# Altium PCB 01DriverOccure&SignalDetect.PcbDoc (part 1 of 3)
Units mil, origin at the board's own origin, x right, y up, seen from the top; angles counter-clockwise.
Board outline 5526.23 x 3781.16 mil, 2 copper layers (Top Layer, Bottom Layer); 144 components, 81 nets, 385 pads, 179 vias.
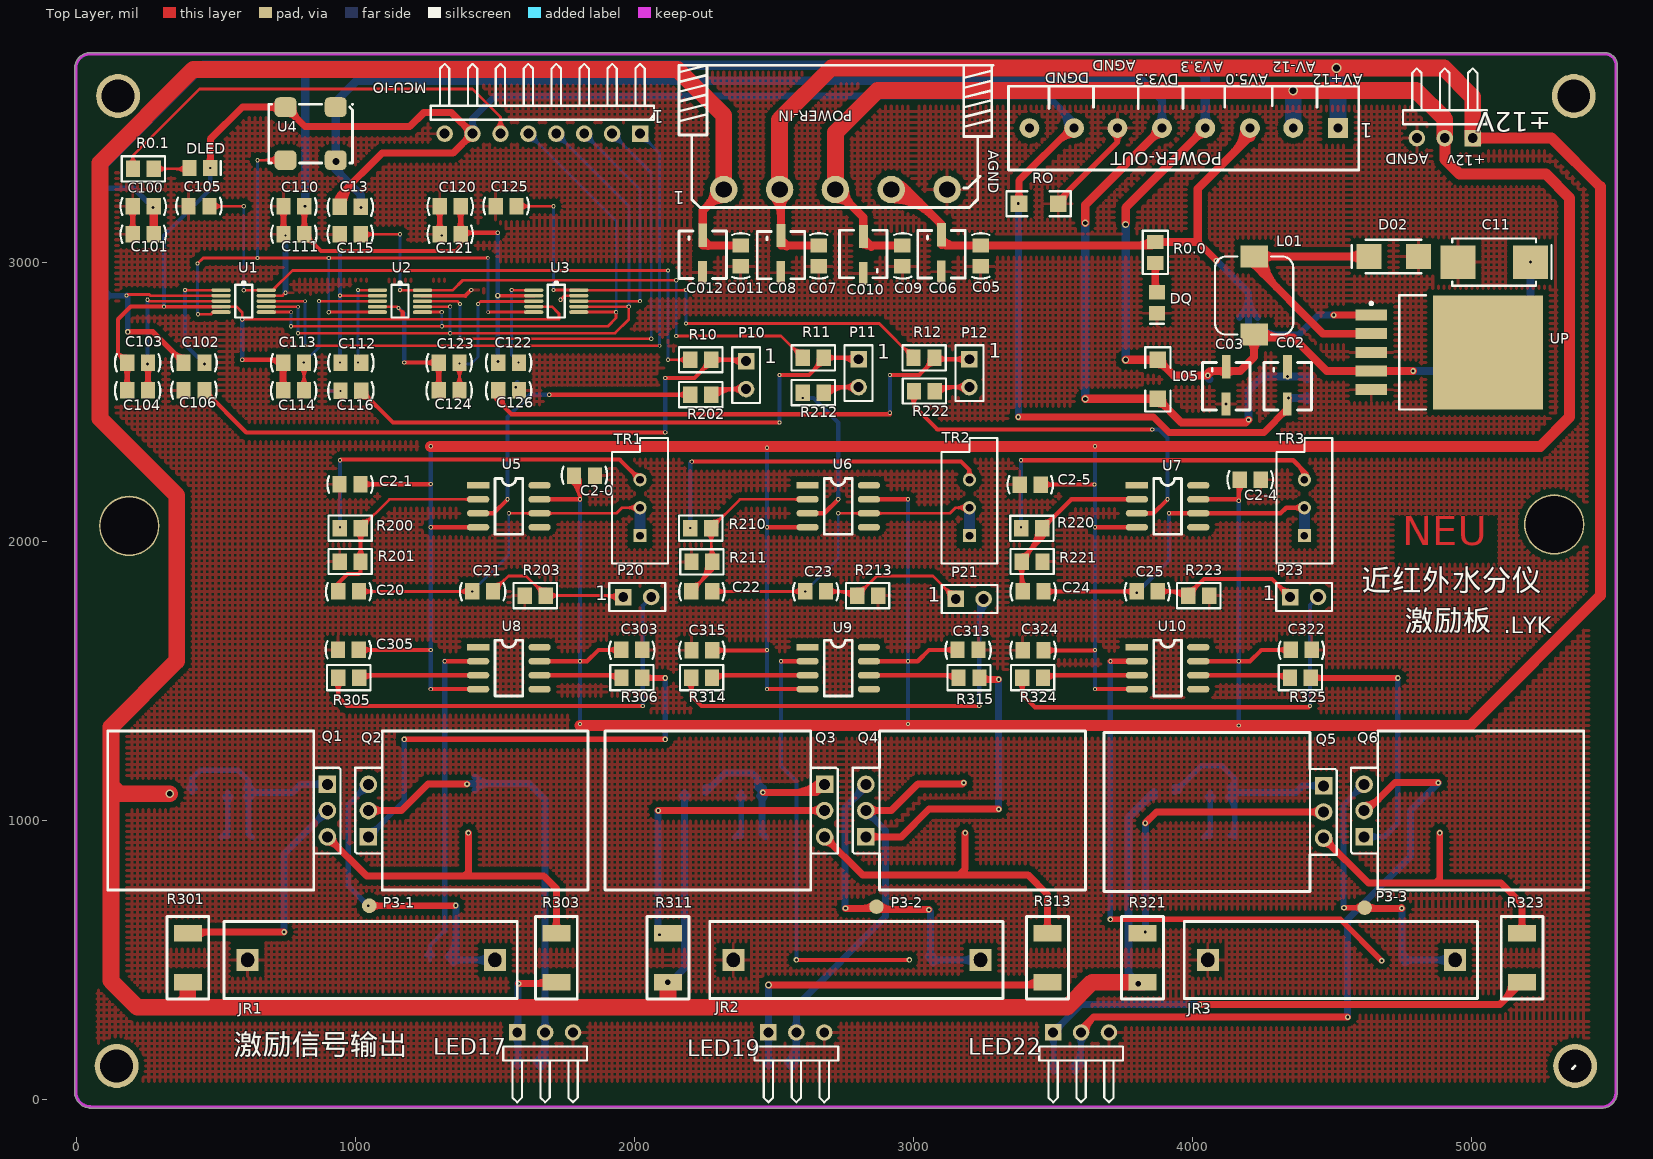
[diagram p0: Top Layer view]
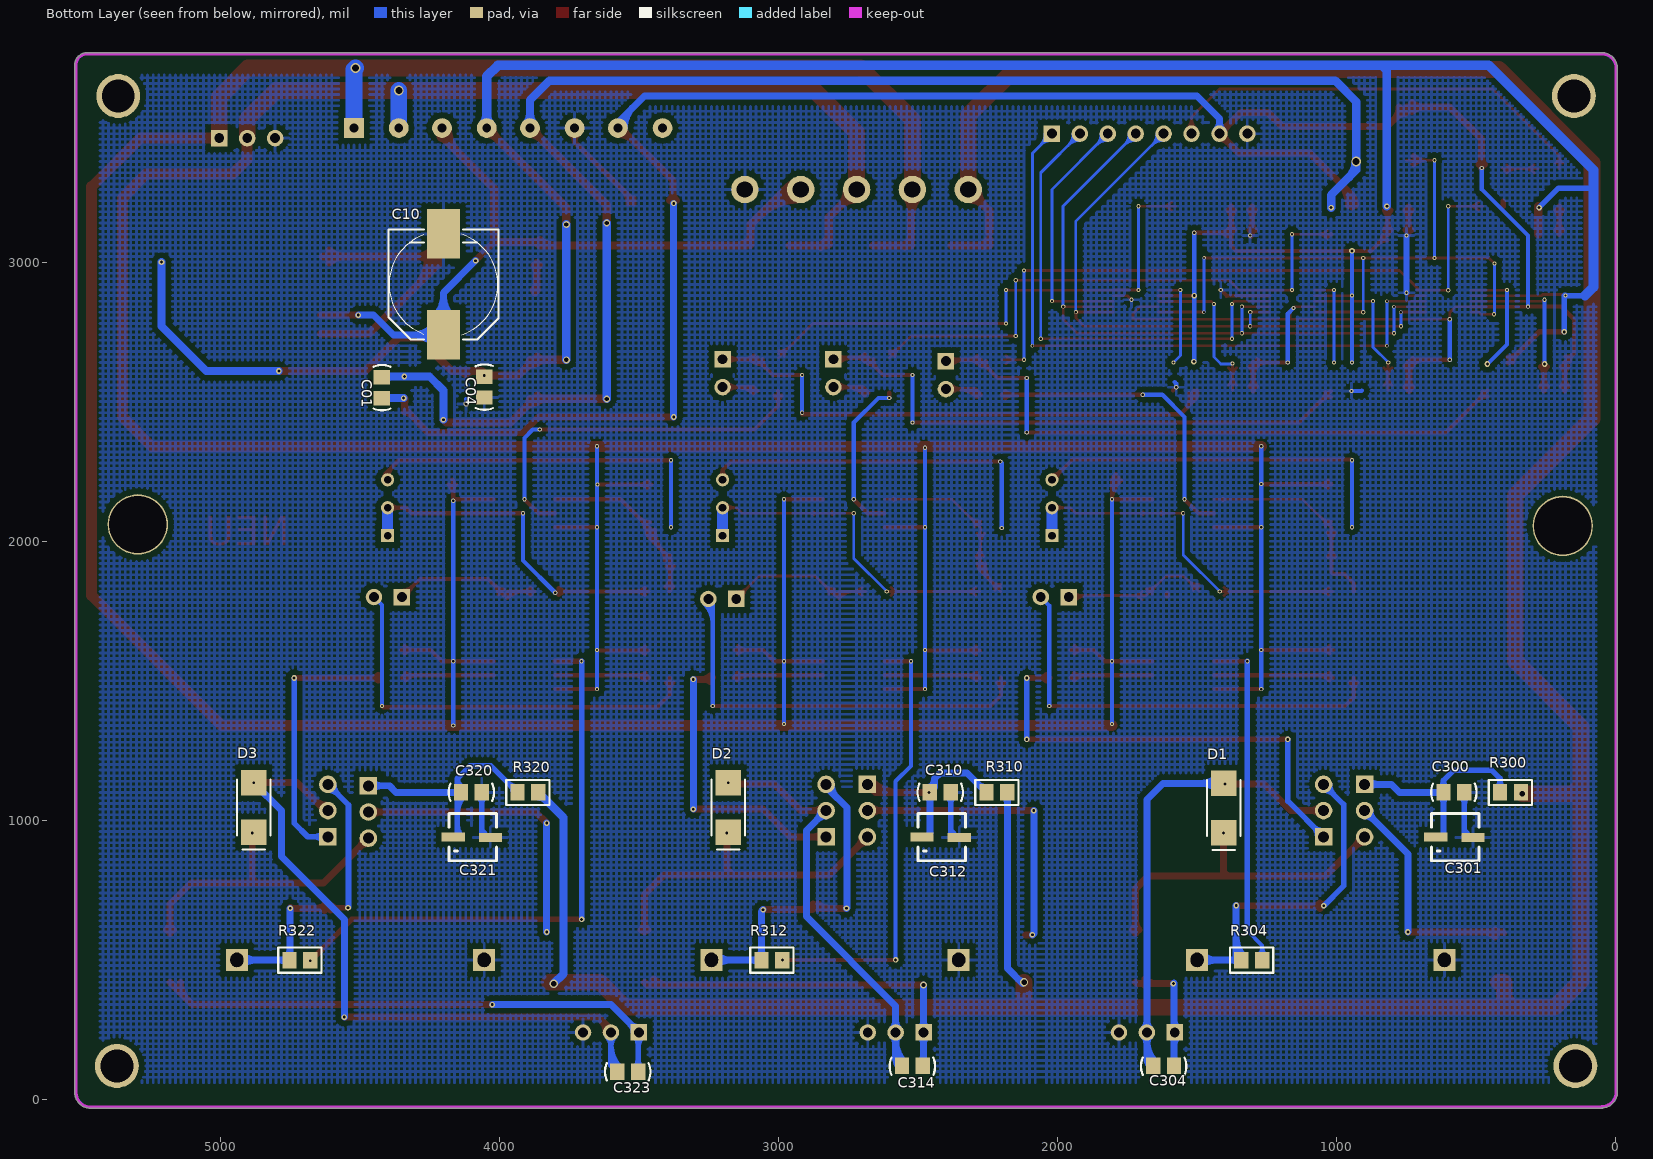
[diagram p1: Bottom Layer view, seen from below]

## Layer stack, top to bottom
Top Layer: signal copper 1.4
Dielectric: dielectric 12.6, FR-4, Dk 4.8
Bottom Layer: signal copper 1.4

## Board outline
-5.01,20.25 -5.01,3693.44 cw(c-0.25,3695) -5.26,3695 cw(c50,3695) 44.5,3749.99 cw(c45,3745) 45,3750.02 5476.71,3750.02 cw(c5476.71,3705.57) 5520.94,3709.99 cw(c5515.95,3709.49) 5520.96,3709.49 5520.27,23.87 cw(c5465,23.87) 5470.5,-31.12 cw(c5470,-26.13) 5470,-31.14 50,-31.14 cw(c50,-26.13) 46.72,-29.92 cw(c50,25.25) -4.99,19.75 cw(c0,20.25)

## Design rules (kind name [scope] priority, off if disabled: settings)
Clearance Clearance_17 [InNamedPolygon('Top Layer-r')] p1: gap=20
Clearance Clearance_16 [InNamedPolygon('Top Layer-b')] p2: gap=20
Clearance Clearance_15 [InNamedPolygon('Top Layer-No Net')] p3: gap=20
Clearance Clearance_14 [InNamedPolygon('Top Layer-No Net')] p4: gap=20
Clearance Clearance_13 [InNamedPolygon('Top Layer-No Net')] p5: gap=15
Clearance Clearance_12 [InNamedPolygon('Top Layer-No Net')] p6: gap=20
Clearance Clearance_11 [InNamedPolygon('Top Layer-No Net')] p7: gap=20
Clearance Clearance_10 [InNamedPolygon('Top Layer-No Net')] p8: gap=10
Clearance Clearance_9 [InNamedPolygon('Top Layer-No Net')] p9: gap=20
Clearance Clearance_8 [InNamedPolygon('Top Layer-No Net')] p10: gap=20
Clearance Clearance_7 [InNamedPolygon('Top Layer-No Net')] p11: gap=20
Clearance Clearance_6 [InNamedPolygon('Top Layer-No Net')] p12: gap=20
Clearance Clearance_5 [InNamedPolygon('Top Layer-No Net')] p13: gap=20
Clearance Clearance_4 [InNamedPolygon('Top Layer-No Net')] p14: gap=30
Clearance Clearance_3 [InNamedPolygon('Top Layer-No Net')] p15: gap=20
Clearance Clearance_2 [InNamedPolygon('Top Layer-No Net')] p16: gap=20
Clearance Clearance_1 [InNamedPolygon('Top Layer-No Net')] p17: gap=20
Clearance [All] p18: gap=6
HoleSize [All] p1: absolutevalues=TRUE maxlimit=296.85 minlimit=1 maxpercent=80.000 minpercent=20.000
HoleToHoleClearance [All] p1: gap=6.06 allowstackedmicrovias=TRUE
PolygonConnect [All] p1: connectstyle=Relief reliefconductorwidth=10 reliefentries=4 polygonreliefangle="90 Angle"
RoutingCorners [All] p1: cornerstyle=45-Degree minsetback=50 maxsetback=493.7
RoutingVias [All] p1: holewidth=28 width=50 viastyle="Through Hole" minholewidth=8 minwidth=10 maxholewidth=246.85 maxwidth=316.22
SilkToSilkClearance [All] p1: silktosilkclearance=8
SilkscreenOverComponentPads [All] p1: minsilkscreentomaskgap=2.13
SolderMaskExpansion [All] p1: expansion=4
TestPointUsage [All] p1: valid=0 allowmultiple=FALSE
Testpoint [All] p1: side=15 testpointundercomponent=TRUE minsize=40 maxsize=100 preferedsize=60 minholesize=0 maxholesize=40 preferedholesize=32 testpointgrid=1 style=1021 order=0-112345678
Width [All] p1: maxlimit=393.7 minlimit=5 preferedwidth=10
19 further rules are at their usual default settings.

## Components (designator, comment, footprint, x,y, rotation, side; value= is the part's Value field where it differs from the comment)
C01 "Cap" CC0805 4421,2550 r270 bottom
C02 "Cap Pol1" "4*4.5 贴片电解电容" 4340,2500 r180 top
C2-0 "Cap" CC0805 1821,2235 r0 top
C2-1 "Cap" CC0805 981,2204 r180 top
C2-4 "Cap" CC0805 4206,2220 r0 top
C2-5 "Cap" CC0805 3418,2203 r180 top
C03 "Cap Pol1" "4*4.5 贴片电解电容" 4120,2500 r180 top
C04 "Cap" CC0805 4054,2552 r270 bottom
C05 "Cap" CC0805 3240,3022 r270 top
C06 "Cap Pol1" "4*4.5 贴片电解电容" 3100,2973 r180 top
C07 "Cap" CC0805 2660,3022 r270 top
C08 "Cap Pol1" "4*4.5 贴片电解电容" 2525,2970 r180 top
C09 "Cap" CC0805 2960,3022 r270 top
C010 "Cap Pol1" "4*4.5 贴片电解电容" 2820,3084 r0 top
C10 "Cap Pol1" C-RB-S10 4200,2920 r90 bottom
C11 "Cap Pol1" CAP-7343 5080,3000 r180 top
C011 "Cap" CC0805 2380,3022 r270 top
C012 "Cap Pol1" "4*4.5 贴片电解电容" 2245,2971 r180 top
C13 "Cap" CC0805 982,3198 r180 top
C20 "Cap" CC0805 976,1820 r180 top
C21 "Cap" CC0805 1456,1820 r180 top
C22 "Cap" CC0805 2241.22,1820 r180 top
C23 "Cap" CC0805 2649,1820 r180 top
C24 "Cap" CC0805 3428.22,1820 r180 top
C25 "Cap" CC0805 3837,1820 r180 top
C100 "Cap2" CC0805 240,3200 r180 top
C101 "Cap" CC0805 240,3100 r180 top
C102 "Cap" CC0805 422,2640 r180 top
C103 "Cap2" CC0805 220,2640 r180 top
C104 "Cap" CC0805 220,2540 r180 top
C105 "Cap" CC0805 440,3200 r0 top
C106 "Cap" CC0805 422,2540 r0 top
C110 "Cap2" CC0805 780,3200 r180 top
C111 "Cap" CC0805 780,3100 r180 top
C112 "Cap" CC0805 984,2640 r180 top
C113 "Cap2" CC0805 779,2640 r180 top
C114 "Cap" CC0805 779,2540 r180 top
C115 "Cap" CC0805 982,3099 r0 top
C116 "Cap" CC0805 984,2538.28 r0 top
C120 "Cap2" CC0805 1340,3200 r180 top
C121 "Cap" CC0805 1340,3100 r180 top
C122 "Cap" CC0805 1549,2640 r180 top
C123 "Cap2" CC0805 1336,2640 r180 top
C124 "Cap" CC0805 1336,2540 r180 top
C125 "Cap" CC0805 1540,3200 r0 top
C126 "Cap" CC0805 1549,2540 r180 top
C300 "Cap" CC0805 580,1100 r180 bottom
C301 "Cap Pol1" "4*4.5 贴片电解电容" 520,940 r270 bottom
C303 "Cap" CC0805 1990,1610.72 r180 top
C304 "Cap" CC0805 1620,120 r0 bottom
C305 "Cap" CC0805 975,1610.72 r0 top
C310 "Cap" CC0805 2420,1100 r180 bottom
C312 "Cap Pol1" "4*4.5 贴片电解电容" 2360,940 r270 bottom
C313 "Cap" CC0805 3195,1610.72 r180 top
C314 "Cap" CC0805 2520,120 r0 bottom
C315 "Cap" CC0805 2241.38,1609 r0 top
C320 "Cap" CC0805 4100,1100 r180 bottom
C321 "Cap Pol1" "4*4.5 贴片电解电容" 4040,940 r270 bottom
C322 "Cap" CC0805 4389,1610.72 r180 top
C323 "Cap" CC0805 3540,100 r0 bottom
C324 "Cap" CC0805 3428,1609 r0 top
D1 "1N5817" DIODE-SMA 1405,1044 r270 bottom
D02 "1N5824" DIODE-SMA 4720,3020 r180 top
D2 "1N5817" DIODE-SMA 3180,1046 r270 bottom
D3 "1N5817" DIODE-SMA 4880,1046 r270 bottom
DLED "Alarm" LED_0805 443,3337 r0 top
DQ "Alarm" LED_0805 3872,2854 r270 top
JR1 "Res2" FUSE 1500,500 r180 top
JR2 "Res2" FUSE 3240,500 r180 top
JR3 "Res2" FUSE 4940,500 r180 top
L01 "Inductor" L-SMD-7 4220,2880 r90 top
L05 "Inductor" 1206 3875,2580 r270 top
LED17 "接入LED17" HDR1X3H 1580,240 r0 top
LED19 "接入LED19" HDR1X3H 2480,240 r0 top
LED22 "接入LED22" HDR1X3H 3500,240 r0 top
MCU-IO "MCU信号输入" HDR1X8H 2020,3460 r180 top
P3-1 "测试点" Text_PAD 1049,696 r90 top
P3-2 "测试点" Text_PAD 2866,693 r90 top
P3-3 "测试点" Text_PAD 4615,689 r90 top
P10 "跳针" HDR1X2 2400,2645 r270 top
P11 "跳针" HDR1X2 2803,2652 r270 top
P12 "跳针" HDR1X2 3200,2652 r270 top
P20 "AMP跳针" HDR1X2 1960,1800 r0 top
P21 "AMP跳针" HDR1X2 3151,1793 r0 top
P23 "AMP跳针" HDR1X2 4349,1800 r0 top
POWER-IN "电源输入" 5角弯式电源插座 2720,3260 r0 top
POWER-OUT "电源输出" 小立式电源接口 4520,3480 r180 top
Q1 "IRF530" TIP122-带卧式散热 900,1035 r90 top
Q2 "TIP122" TIP122-带卧式散热 1047,1035 r270 top
Q3 "IRF530" TIP122-带卧式散热 2681,1035 r90 top
Q4 "TIP122" TIP122-带卧式散热 2829,1035 r270 top
Q5 "IRF530" TIP122-带卧式散热 4469,1030 r90 top
Q6 "TIP122" TIP122-带卧式散热 4614,1035 r270 top
R0.0 "1K" 0805 3866,2997 r90 top
R0.1 "500" 0805 278,3334 r180 top
R10 "Res2" 0805 2200,2650 r0 top
R11 "Res2" 0805 2603,2657 r0 top
R12 "Res2" 0805 3000,2657 r0 top
R200 "Res2" 0805 1019,2047 r180 top
R201 "Res2" 0805 944,1927 r0 top
R202 "Res2" 0805 2275,2525 r180 top
R203 "Res2" 0805 1607,1805 r0 top
R210 "Res2" 0805 2275,2047 r180 top
R211 "Res2" 0805 2204,1926 r0 top
R212 "Res2" 0805 2678,2532 r180 top
R213 "Res2" 0805 2873,1805 r180 top
R220 "Res2" 0805 3461,2046 r180 top
R221 "Res2" 0805 3462,1927 r180 top
R222 "Res2" 0805 3076,2538 r180 top
R223 "Res2" 0805 4059,1805 r180 top
R300 "Res2" 0805 340,1100 r0 bottom
R301 "Res2" 2010贴片 400,420 r90 top
R303 "Res2" 2010贴片 1720,420 r90 top
R304 "Res2" 0805 1267,499 r0 bottom
R305 "Res2" 0805 939,1511 r0 top
R306 "Res2" 0805 2028,1511 r180 top
R310 "Res2" 0805 2180,1100 r0 bottom
R311 "Res2" 2010贴片 2120,420 r90 top
R312 "Res2" 0805 2986,499 r0 bottom
R313 "Res2" 2010贴片 3480,420 r90 top
R314 "Res2" 0805 2203,1511 r0 top
R315 "Res2" 0805 3236,1511 r180 top
R320 "Res2" 0805 3860,1100 r0 bottom
R321 "Res2" 2010贴片 3820,420 r90 top
R322 "Res2" 0805 4677,499 r0 bottom
R323 "Res2" 2010贴片 5180,420 r90 top
R324 "Res2" 0805 3389,1511 r0 top
R325 "Res2" 0805 4423,1511 r180 top
RO "Res2" 1206 3448,3209 r180 top
TR1 "RPot" VR5 2020,2120 r90 top
TR2 "RPot" VR5 3200,2120 r90 top
TR3 "RPot" VR5 4400,2120 r90 top
U1 "AD9833" MSOP_AD9833_10N 600,2860 r0 top
U2 "AD9833" MSOP_AD9833_10N 1160,2860 r0 top
U3 "AD9833" MSOP_AD9833_10N 1720,2860 r0 top
U4 "MCLK" X-CPX75 840,3460 r0 top
U5 "OP37EZ" SO-8-N 1440,2200 r0 top
U6 "OP37EZ" SO-8-N 2620,2200 r0 top
U7 "OP37EZ" SO-8-N 3800,2200 r0 top
U8 "OPA07" SO-8-N 1440,1620 r0 top
U9 "OPA07" SO-8-N 2620,1620 r0 top
U10 "OPA07" SO-8-N 3800,1620 r0 top
UP "LM2596S-3.3" LM2596S 4740,2680 r0 top
±12V "信号处理板连接" HDR1X3H 5003,3444 r180 top

## Footprints (in the part's own frame and the unit in brackets; to place one, negate y for a bottom-side part, rotate by r counter-clockwise, add the part's x,y. Pads: shape width x height; smd on the part's side, far side on the other; paste and mask are expansions set on the pad)
"4*4.5 贴片电解电容" [mm] "10uf-16V / 25V铝电解电容"
  rect 0.8x2.1 smd: 1(0,-3.175) 2(0.025,0.203)
  silkscreen extent -2.16,-3.56 2.16,0.76
5角弯式电源插座 [mm]
  round 2.5 hole 1.5: 1(-10.16,0) 2(-5.08,0) 3(0,0) 4(5.08,0) 5(10.16,0)
  silkscreen extent -14.22,-1.65 14.35,11.3
0805 [mm]
  rect 1.3x1.5 smd: 1(0,0) 2(1.9,0)
  silkscreen extent -1.02,-1.14 2.92,1.14
1206 [mil] "贴片元件"
  rect 60x60 smd: 1(-70,0) 2(70,0)
  silkscreen extent -115,-45 115,45, body extent -75,-35 75,35, height 39
2010贴片 [mm]
  rect 1.52x2.54 smd: 1(0,0) 2(4.445,0)
  silkscreen extent -1.52,-1.91 5.97,1.91
C-RB-S10 [mm] "贴片电解"
  rect 4.5x3 smd: 1(-4.6,0) 2(4.6,0)
  silkscreen extent -5,-5 5,5
CAP-7343 [mm] "钽电容"
  rect 3.2x3.05 smd: 1(-3.302,0) 2(3.302,0)
  silkscreen extent -5.21,-2.16 3.81,2.16, body extent -3.68,-1.91 3.68,1.91, height 2.95
CC0805 [mm] "贴片电容"
  rect 1.3x1.5 smd: 1(-0.95,0) 2(0.95,0)
  silkscreen extent -2.06,-0.76 2.06,0.81, body extent -1.27,-0.64 1.27,0.64, height 0.9
DIODE-SMA [mm] "贴片二极管"
  rect 2.3x2.3 smd: 1(-2.25,0) 2(2.25,0)
  silkscreen extent -2.54,-1.52 3.81,1.52, body extent -2.92,-1.4 2.92,1.4, height 3
FUSE [mm]
  rect 2x2 hole 1.2 slot 1.3 at 90 deg: 1(0,0) 2(22.5,0)
  silkscreen extent -2.03,-3.5 24.64,3.53
HDR1X2 [mm] "Connector; Header; 2 Position"
  rect 1.5x1.5 hole 0.9: 1(0,0)
  round 1.5 hole 0.9: 2(2.54,0)
  silkscreen extent -1.27,-1.27 3.81,1.27
HDR1X3H [mm] "Connector; Header; 3 Position; Right Angle"
  rect 1.5x1.5 hole 0.9: 1(0,0)
  round 1.5 hole 0.9: 2(2.54,0) 3(5.08,0)
  silkscreen extent -1.27,-6.35 6.35,-1.27
HDR1X8H [mm] "Connector; Header; 8 Position; Right Angle"
  rect 1.5x1.5 hole 0.9: 1(0,0)
  round 1.5 hole 0.9: 2(2.54,0) 3(5.08,0) 4(7.62,0) 5(10.16,0) 6(12.7,0) 7(15.24,0) 8(17.78,0)
  silkscreen extent -1.27,-6.35 19.05,-1.27
L-SMD-7 [mm] "贴片电感7*7"
  rect 2x2.5 smd: 1(-3.556,0) 2(3.556,0)
  silkscreen extent -3.56,-3.56 3.56,3.56, body extent -3.56,-3.56 3.56,3.56, height 4
LED_0805 [mm] "贴片二极管"
  rect 1.3x1.5 smd: 1(-0.95,0) 2(0.95,0)
  silkscreen extent 1.91,-0.64 1.91,0.64
LM2596S [mm]
  rect 2.9x1 smd: 1(-2.545,3.313) 2(-2.545,1.613) 3(-2.545,-0.087) 4(-2.545,-1.787) 5(-2.545,-3.487)
  rect 10x10.4 smd: 6(8.077,-0.102)
  silkscreen extent -2.67,-5.29 2.4,5.11, body extent 0,-5.29 9.4,5.11, height 4.65
MSOP_AD9833_10N [mm] "TSSOP, 10-Leads, Body 3.0x3.0mm (max), Pitch 0.50mm, IPC Medium Density"
  oval 1.75x0.345 smd mask+0.092: 1(-2.05,1) 2(-2.05,0.5)
  oval 1.75x0.345 smd: 3(-2.05,0) 4(-2.05,-0.5) 5(-2.05,-1) 6(2.05,-1) 7(2.05,-0.5) 8(2.05,0) 9(2.05,0.5) 10(2.05,1)
  silkscreen extent -0.78,-1.5 0.78,1.78
SO-8-N [mil]
  rect 80x24 smd: 1(0,0)
  oval 80x24 smd: 2(0,-50) 3(0,-100) 4(0,-150) 5(220,-150) 6(220,-100) 7(220,-50) 8(220,0)
  silkscreen extent 60,-175 160,25
Text_PAD [mil]
  round 52.13 smd: 0(-2,-1)
TIP122-带卧式散热 [mm]
  rect 1.6x1.6 hole 1: 1(2.385,0)
  round 1.6 hole 1: 2(0,0) 3(-2.39,0)
  silkscreen extent -7.24,-1.19 7.24,19.99
VR5 [mm] "Potentiometer; 3 Leads"
  rect 1.2x1.2 hole 0.7: 1(-2.54,0)
  round 1.2 hole 0.7: 2(0,0) 3(2.54,0)
  silkscreen extent -5.08,-2.54 6.35,2.54
X-CPX75 [mm]
  rrect50% 2x1.8 smd: 1(2.281,2.415) 2(-2.291,2.415) 3(-2.291,-2.411) 4(2.281,-2.411)
  silkscreen extent -3.81,-2.66 3.81,2.67
小立式电源接口 [mm]
  rect 1.8x1.8 hole 0.8: 1(0,0)
  round 1.8 hole 0.8: 2(4.064,0) 3(8.001,0) 4(12.065,0) 5(16.002,0) 6(20.066,0) 7(24.003,0) 8(28.067,0)
  silkscreen extent -1.91,-3.81 29.97,3.81

## Part data
C01 C2-0 C2-1 C2-4 C2-5 C04 C05 C07 C09 C011 C13 C20 C21 C22 C23 C24 C25 C100 C101 C102 C103 C104 C105 C106 C110 C111 C112 C113 C114 C115 C116 C120 C121 C122 C123 C124 C125 C126 C300 C303 C304 C305 C310 C313 C314 C315 C320 C322 C323 C324: "Capacitor"
C02 C03 C06 C08 C010 C10 C11 C012 C301 C312 C321: "Polarized Capacitor (Radial)"
D1 D2 D3: library part DIODE, "Diode"
D02: library part "D Schottky", "Schottky Diode"
DLED DQ: library part LED0, "Typical INFRARED GaAs LED"
JR1 JR2 JR3 R10 R11 R12 R200 R201 R202 R203 R210 R211 R212 R213 R220 R221 R222 R223 R300 R301 R303 R304 R305 R306 R310 R311 R312 R313 R314 R315 R320 R321 R322 R323 R324 R325 RO: "Resistor"
LED17 LED19 LED22 ±12V: library part "Header 3H", "Header, 3-Pin, Right Angle"
MCU-IO: library part "Header 8H", "Header, 8-Pin, Right Angle"
P10 P11 P12 P20 P21 P23: library part "Header 2", "Header, 2-Pin"
POWER-IN: library part "Header 5H", "Header, 5-Pin, Right Angle"
POWER-OUT: library part "Header 8", "Header, 8-Pin"
Q1 Q3 Q5: library part NMOS-2, "N-Channel Power MOSFET"
Q2 Q4 Q6: library part NPN2, "NPN Darlington Bipolar Transistor"
R0.0 R0.1: library part RES2
TR1 TR2 TR3: "Potentiometer"
U1 U2 U3: "波形发生器"
U4: "有源晶振1MHZ ,5V"
U5 U6 U7: "Low-Noise, Precision, High-Speed Operational Amplifier (Avcl >= 5)"
U8 U9 U10: library part OP37GS, "Low-Noise, Precision, High-Speed Operational Amplifier (Avcl >= 5)"
UP: library part LM2596S-5.0, "Simple Switcher Power Converter 150 kHz 3A Step Down Voltage Regulator"

## Free pads (board coordinates)
  round 157.48 hole 118.11: 0(145,120) 1(150,3595) 2(5370,120) 3(5365,3595)
  round 216.54 hole 204.72: 4(190,2055) 5(5295,2060)

## Via types
v1: diameter 15, hole 8, Top Layer to Bottom Layer, 110 vias
v2: diameter 20, hole 10, Top Layer to Bottom Layer, 51 vias
v3: diameter 12, hole 8, Top Layer to Bottom Layer, 7 vias
v4: diameter 25, hole 15, Top Layer to Bottom Layer, 5 vias
v5: diameter 30, hole 20, Top Layer to Bottom Layer, 3 vias
v6: diameter 35, hole 25, Top Layer to Bottom Layer, 3 vias

## Nets (pads, with @x,y where several pads share a name; then routed paths per layer and width w, separated by ;. In a path a pad name is that pad's centre, name@x,y a point inside that pad or via, vN(x,y) a via of type N, cw(c..) or ccw(c..) an arc to the next point about the centre after c; other vN are vias at no path point)
AD9833_OUT1: C106.2 P10.1 R10.2 | length 3097.8
  Top Layer w15: C106.2@459.4,2540 609.4,2390 v1(2110,2390) ; v1(2110,2585) 2215,2585 2274.8,2644.8 R10.2@2274.8,2650 2395,2650 P10.1@2400,2645 ; C106.2@459.4,2517.97 cw(c459.4,2464.79) 497.01,2502.4 ; C106.2@459.4,2517.97 cw(c459.4,2464.79) 497.01,2502.4 ; C106.2@459.4,2517.97 cw(c459.4,2464.79) 497.01,2502.4 ; C106.2@477.49,2536.06 ccw(c511.66,2536.06) 487.5,2511.9 ; C106.2@477.49,2536.06 ccw(c511.66,2536.06) 487.5,2511.9 ; C106.2@477.49,2536.06 ccw(c511.66,2536.06) 487.5,2511.9 ; 2243.03,2613.03 ccw(c2210,2646.06) R10.2@2256.71,2646.06 ; 2243.03,2613.03 ccw(c2210,2646.06) R10.2@2256.71,2646.06 ; 2243.03,2613.03 ccw(c2210,2646.06) R10.2@2256.71,2646.06 ; 2246.07,2616.07 cw(c2274.8,2587.34) R10.2@2274.8,2627.97 ; 2246.07,2616.07 cw(c2274.8,2587.34) R10.2@2274.8,2627.97 ; 2246.07,2616.07 cw(c2274.8,2587.34) R10.2@2274.8,2627.97 ; R10.2@2287.6,2637.21 cw(c2318.48,2606.33) 2318.48,2650 ; R10.2@2287.6,2637.21 cw(c2318.48,2606.33) 2318.48,2650 ; R10.2@2287.6,2637.21 cw(c2318.48,2606.33) 2318.48,2650 ; R10.2@2287.6,2662.79 ccw(c2318.48,2693.67) 2318.48,2650 ; R10.2@2287.6,2662.79 ccw(c2318.48,2693.67) 2318.48,2650 ; R10.2@2287.6,2662.79 ccw(c2318.48,2693.67) 2318.48,2650 ; 2334.75,2650 cw(c2334.75,2579.75) P10.1@2384.42,2629.42 ; 2334.75,2650 cw(c2334.75,2579.75) P10.1@2384.42,2629.42 ; 2334.75,2650 cw(c2334.75,2579.75) P10.1@2384.42,2629.42 ; 2358.89,2650 ccw(c2358.89,2686.11) P10.1@2384.42,2660.58 ; 2358.89,2650 ccw(c2358.89,2686.11) P10.1@2384.42,2660.58 ; 2358.89,2650 ccw(c2358.89,2686.11) P10.1@2384.42,2660.58
  Bottom Layer w15: v1(2110,2390) v1(2110,2585)
AD9833_OUT2: C116.2 P11.1 R11.2 | length 2899.7
  Top Layer w15: C116.2@1021.4,2538.28 1134.68,2425 v1(2520,2425) ; v1(2520,2595) 2625,2595 2677.8,2647.8 R11.2@2677.8,2657 2798,2657 P11.1@2803,2652 ; C116.2@1021.4,2516.25 cw(c1021.4,2463.07) 1059.01,2500.68 ; C116.2@1021.4,2516.25 cw(c1021.4,2463.07) 1059.01,2500.68 ; C116.2@1021.4,2516.25 cw(c1021.4,2463.07) 1059.01,2500.68 ; C116.2@1039.49,2534.34 ccw(c1073.66,2534.34) 1049.5,2510.18 ; C116.2@1039.49,2534.34 ccw(c1073.66,2534.34) 1049.5,2510.18 ; C116.2@1039.49,2534.34 ccw(c1073.66,2534.34) 1049.5,2510.18 ; 2643.2,2613.2 ccw(c2603.34,2653.06) R11.2@2659.71,2653.06 ; 2643.2,2613.2 ccw(c2603.34,2653.06) R11.2@2659.71,2653.06 ; 2643.2,2613.2 ccw(c2603.34,2653.06) R11.2@2659.71,2653.06 ; 2655.9,2625.9 cw(c2677.8,2603.99) R11.2@2677.8,2634.97 ; 2655.9,2625.9 cw(c2677.8,2603.99) R11.2@2677.8,2634.97 ; 2655.9,2625.9 cw(c2677.8,2603.99) R11.2@2677.8,2634.97 ; R11.2@2690.6,2644.21 cw(c2721.48,2613.33) 2721.48,2657 ; R11.2@2690.6,2644.21 cw(c2721.48,2613.33) 2721.48,2657 ; R11.2@2690.6,2644.21 cw(c2721.48,2613.33) 2721.48,2657 ; R11.2@2690.6,2669.79 ccw(c2721.48,2700.67) 2721.48,2657 ; R11.2@2690.6,2669.79 ccw(c2721.48,2700.67) 2721.48,2657 ; R11.2@2690.6,2669.79 ccw(c2721.48,2700.67) 2721.48,2657 ; 2737.75,2657 cw(c2737.75,2586.75) P11.1@2787.42,2636.42 ; 2737.75,2657 cw(c2737.75,2586.75) P11.1@2787.42,2636.42 ; 2737.75,2657 cw(c2737.75,2586.75) P11.1@2787.42,2636.42 ; 2761.89,2657 ccw(c2761.89,2693.11) P11.1@2787.42,2667.58 ; 2761.89,2657 ccw(c2761.89,2693.11) P11.1@2787.42,2667.58 ; 2761.89,2657 ccw(c2761.89,2693.11) P11.1@2787.42,2667.58
  Bottom Layer w15: v1(2520,2425) v1(2520,2595)
AD9833_OUT3: C126.2 P12.1 R12.2 | length 3312.7
  Top Layer w15: C126.2@1511.6,2540 1511.6,2503.4 ; v1@2915,2455 1560,2455 1511.6,2503.4 ; v1(2915,2595) 3020,2595 3074.8,2649.8 R12.2@3074.8,2657 3079.8,2652 P12.1@3200,2652 ; C126.2@1500.21,2539.56 ccw(c1531.71,2529.89) 1508.41,2506.59 ; C126.2@1500.21,2539.56 ccw(c1531.71,2529.89) 1508.41,2506.59 ; C126.2@1500.21,2539.56 ccw(c1531.71,2529.89) 1508.41,2506.59 ; C126.2@1502,2520.73 cw(c1491.16,2503.4) 1511.6,2503.4 ; C126.2@1502,2520.73 cw(c1491.16,2503.4) 1511.6,2503.4 ; C126.2@1502,2520.73 cw(c1491.16,2503.4) 1511.6,2503.4 ; C126.2@1502,2520.73 cw(c1491.16,2503.4) 1511.6,2503.4 ; C126.2@1502,2520.73 cw(c1491.16,2503.4) 1511.6,2503.4 ; C126.2@1502,2520.73 cw(c1491.16,2503.4) 1511.6,2503.4 ; 1511.6,2503.4 cw(c1532.03,2503.4) C126.2@1521.19,2520.73 ; 1511.6,2503.4 cw(c1532.03,2503.4) C126.2@1521.19,2520.73 ; 1511.6,2503.4 cw(c1532.03,2503.4) C126.2@1521.19,2520.73 ; 1511.6,2503.4 cw(c1532.03,2503.4) C126.2@1521.19,2520.73 ; 1511.6,2503.4 cw(c1532.03,2503.4) C126.2@1521.19,2520.73 ; 1511.6,2503.4 cw(c1532.03,2503.4) C126.2@1521.19,2520.73 ; C126.2@1514.55,2535.16 ccw(c1558.68,2521.6) 1526.04,2488.96 ; C126.2@1514.55,2535.16 ccw(c1558.68,2521.6) 1526.04,2488.96 ; C126.2@1514.55,2535.16 ccw(c1558.68,2521.6) 1526.04,2488.96 ; C126.2@1528.89,2530.75 ccw(c1585.66,2513.32) 1543.67,2471.33 ; C126.2@1528.89,2530.75 ccw(c1585.66,2513.32) 1543.67,2471.33 ; C126.2@1528.89,2530.75 ccw(c1585.66,2513.32) 1543.67,2471.33 ; 2902.93,2455 ccw(c2902.93,2472.07) v1(2915,2460) ; 2902.93,2455 ccw(c2902.93,2472.07) v1(2915,2460) ; 2902.93,2455 ccw(c2902.93,2472.07) v1(2915,2460) ; 3041.62,2616.62 ccw(c3005.17,2653.06) R12.2@3056.71,2653.06 ; 3041.62,2616.62 ccw(c3005.17,2653.06) R12.2@3056.71,2653.06 ; 3041.62,2616.62 ccw(c3005.17,2653.06) R12.2@3056.71,2653.06 ; 3049.49,2624.49 cw(c3074.8,2599.17) R12.2@3074.8,2634.97 ; 3049.49,2624.49 cw(c3074.8,2599.17) R12.2@3074.8,2634.97 ; 3049.49,2624.49 cw(c3074.8,2599.17) R12.2@3074.8,2634.97 ; R12.2@3087.6,2640.27 cw(c3115.91,2611.95) 3115.91,2652 ; R12.2@3087.6,2640.27 cw(c3115.91,2611.95) 3115.91,2652 ; R12.2@3087.6,2640.27 cw(c3115.91,2611.95) 3115.91,2652 ; R12.2@3087.6,2665.85 ccw(c3121.04,2699.3) 3121.04,2652 ; R12.2@3087.6,2665.85 ccw(c3121.04,2699.3) 3121.04,2652 ; R12.2@3087.6,2665.85 ccw(c3121.04,2699.3) 3121.04,2652 ; 3146.82,2652 ccw(c3146.82,2705.18) P12.1@3184.42,2667.58 ; 3146.82,2652 cw(c3146.82,2598.82) P12.1@3184.42,2636.42 ; 3146.82,2652 ccw(c3146.82,2705.18) P12.1@3184.42,2667.58 ; 3146.82,2652 cw(c3146.82,2598.82) P12.1@3184.42,2636.42 ; 3146.82,2652 ccw(c3146.82,2705.18) P12.1@3184.42,2667.58 ; 3146.82,2652 cw(c3146.82,2598.82) P12.1@3184.42,2636.42
  Bottom Layer w15: v1(2915,2460) v1(2915,2595)
AGND: C2-0.2 C2-1.2 C2-4.2 C2-5.2 C03.2 C04.2 C05.2 C06.2 C07.2 C08.2 C09.2 C010.1 C10.2 C11.2 C011.2 C012.2 C100.2 C101.2 C105.1 C106.1 C110.2 C111.2 C115.1 C116.1 C120.2 C121.2 C125.1 C126.1 C300.2 C301.2 C303.1 C305.1 C310.2 C312.2 C313.1 C315.1 C320.2 C321.2 C322.1 C324.1 D02.1 DQ.2 JR1.2 JR2.2 JR3.2 LED17.3 LED19.3 LED22.3 MCU-IO.8 POWER-IN.5 POWER-OUT.6 R201.1 R203.1 R211.1 R213.1 R221.1 R223.1 RO.1 U1.9 U2.9 U3.9 UP.3 UP.5 ±12V.3 | length 4493.3
  Top Layer w10: U1.9@680.71,2879.69 739.69,2879.69 v1(750,2890) ; C111.2@745,3100 v1(750,3095) ; v1@1735.63,2865 1750.31,2879.69 U3.9@1800.71,2879.69
  Top Layer w13: U2.9@1240.71,2879.69 1394.69,2879.69
  Top Layer w15: C116.1@946.6,2538.28 v1(946.6,2538.4) ; 1394.69,2879.69 v1(1415,2900) ; v1(1575,2551.4) C126.1@1586.4,2540 ; v1(1735,2865) v1@1735.63,2865
  Top Layer w20: C101.2@202.6,3100 C100.2@202.6,3200 ; C105.1@402.6,3200 C105.1@402.6,3217.6 ; C111.2@742.6,3100 C110.2@742.6,3200 ; C121.2@1302.6,3100 C120.2@1302.6,3200 ; MCU-IO.8@1320,3455 MCU-IO.8@1320,3460 ; R203.1@1607,1805 R203.1@1607,1812 ; RO.1@3518,3209 3518,3218 3730,3430 ; POWER-OUT.6@3730,3480 3730,3430 ; C101.2@191.57,3114.96 ccw(c164.96,3141.58) 202.6,3141.58 ; C101.2@191.57,3114.96 ccw(c164.96,3141.58) 202.6,3141.58 ; C101.2@191.57,3114.96 ccw(c164.96,3141.58) 202.6,3141.58 ; C100.2@191.57,3185.04 cw(c164.96,3158.42) 202.6,3158.42 ; C100.2@191.57,3185.04 cw(c164.96,3158.42) 202.6,3158.42 ; C100.2@191.57,3185.04 cw(c164.96,3158.42) 202.6,3158.42 ; 202.6,3141.58 ccw(c240.24,3141.58) C101.2@213.62,3114.96 ; 202.6,3141.58 ccw(c240.24,3141.58) C101.2@213.62,3114.96 ; 202.6,3141.58 ccw(c240.24,3141.58) C101.2@213.62,3114.96 ; 202.6,3158.42 cw(c240.24,3158.42) C100.2@213.62,3185.04 ; 202.6,3158.42 cw(c240.24,3158.42) C100.2@213.62,3185.04 ; 202.6,3158.42 cw(c240.24,3158.42) C100.2@213.62,3185.04 ; C111.2@731.57,3114.96 ccw(c704.96,3141.58) 742.6,3141.58 ; C111.2@731.57,3114.96 ccw(c704.96,3141.58) 742.6,3141.58 ; C111.2@731.57,3114.96 ccw(c704.96,3141.58) 742.6,3141.58 ; C110.2@731.57,3185.04 cw(c704.96,3158.42) 742.6,3158.42 ; C110.2@731.57,3185.04 cw(c704.96,3158.42) 742.6,3158.42 ; C110.2@731.57,3185.04 cw(c704.96,3158.42) 742.6,3158.42 ; C111.2@742.6,3106.83 ccw(c761.83,3106.83) C111.2@748.23,3093.23 ; C111.2@742.6,3106.83 ccw(c761.83,3106.83) C111.2@748.23,3093.23 ; C111.2@742.6,3106.83 ccw(c761.83,3106.83) C111.2@748.23,3093.23 ; 742.6,3141.58 ccw(c780.24,3141.58) C111.2@753.62,3114.96 ; 742.6,3141.58 ccw(c780.24,3141.58) C111.2@753.62,3114.96 ; 742.6,3141.58 ccw(c780.24,3141.58) C111.2@753.62,3114.96 ; 742.6,3158.42 cw(c780.24,3158.42) C110.2@753.62,3185.04 ; 742.6,3158.42 cw(c780.24,3158.42) C110.2@753.62,3185.04 ; 742.6,3158.42 cw(c780.24,3158.42) C110.2@753.62,3185.04 ; C121.2@1291.57,3114.96 ccw(c1264.96,3141.58) 1302.6,3141.58 ; C121.2@1291.57,3114.96 ccw(c1264.96,3141.58) 1302.6,3141.58 ; C121.2@1291.57,3114.96 ccw(c1264.96,3141.58) 1302.6,3141.58 ; C120.2@1291.57,3185.04 cw(c1264.96,3158.42) 1302.6,3158.42 ; C120.2@1291.57,3185.04 cw(c1264.96,3158.42) 1302.6,3158.42 ; C120.2@1291.57,3185.04 cw(c1264.96,3158.42) 1302.6,3158.42 ; 1302.6,3141.58 ccw(c1340.24,3141.58) C121.2@1313.62,3114.96 ; 1302.6,3141.58 ccw(c1340.24,3141.58) C121.2@1313.62,3114.96 ; 1302.6,3141.58 ccw(c1340.24,3141.58) C121.2@1313.62,3114.96 ; 1302.6,3158.42 cw(c1340.24,3158.42) C120.2@1313.62,3185.04 ; 1302.6,3158.42 cw(c1340.24,3158.42) C120.2@1313.62,3185.04 ; 1302.6,3158.42 cw(c1340.24,3158.42) C120.2@1313.62,3185.04 ; RO.1@3518,3229 ccw(c3518,3255.56) RO.1@3536.78,3236.78 ; RO.1@3518,3229 ccw(c3518,3255.56) RO.1@3536.78,3236.78 ; RO.1@3518,3229 ccw(c3518,3255.56) RO.1@3536.78,3236.78 ; RO.1@3538,3209 cw(c3608.01,3209) 3558.51,3258.51 ; RO.1@3538,3209 cw(c3608.01,3209) 3558.51,3258.51 ; RO.1@3538,3209 cw(c3608.01,3209) 3558.51,3258.51 ; POWER-OUT.6@3715.02,3459.44 cw(c3693.57,3430) 3730,3430 ; POWER-OUT.6@3715.02,3459.44 cw(c3693.57,3430) 3730,3430 ; POWER-OUT.6@3715.02,3459.44 cw(c3693.57,3430) 3730,3430 ; 3730,3430 cw(c3766.43,3430) POWER-OUT.6@3744.98,3459.44 ; 3730,3430 cw(c3766.43,3430) POWER-OUT.6@3744.98,3459.44 ; 3730,3430 cw(c3766.43,3430) POWER-OUT.6@3744.98,3459.44 ; C121.2@1302.6,3106.83 ccw(c1321.83,3106.83) 1308.23,3093.23 cw(c1321.83,3106.83) C121.2@1302.6,3106.83
  Bottom Layer w15: 910,2540 911.6,2538.4 v1(946.6,2538.4) ; v2(4119,2492) 4119,2509 ; v1(1575,2551.4) cw(c1593.64,2556.36) 1580,2570 ; v1(1575,2551.4) cw(c1593.64,2556.36) 1580,2570 ; v1(1575,2551.4) 1575,2565 1580,2570
  Bottom Layer w20: C301.2@520,940 542.6,962.6 ; C300.2@542.6,1100 542.6,962.6 ; v1(750,2890) v1(750,3095) ; C312.2@2360,940 2382.6,962.6 ; C310.2@2382.6,1100 2382.6,962.6 ; C321.2@4040,940 4062.6,962.6 ; C320.2@4062.6,1100 4062.6,962.6 ; C300.2@531.57,1085.04 cw(c504.96,1058.42) 542.6,1058.42 ; C300.2@531.57,1085.04 cw(c504.96,1058.42) 542.6,1058.42 ; C300.2@531.57,1085.04 cw(c504.96,1058.42) 542.6,1058.42 ; 542.6,962.6 cw(c517.08,962.6) 533.82,943.34 ccw(c517.08,962.6) 542.6,962.6 ; 542.6,962.6 ccw(c552.87,952.33) 541.92,942.78 cw(c552.87,952.33) 542.6,962.6 ; 542.6,1058.42 cw(c580.24,1058.42) C300.2@553.62,1085.04 ; 542.6,1058.42 cw(c580.24,1058.42) C300.2@553.62,1085.04 ; 542.6,1058.42 cw(c580.24,1058.42) C300.2@553.62,1085.04 ; C310.2@2371.57,1085.04 cw(c2344.96,1058.42) 2382.6,1058.42 ; C310.2@2371.57,1085.04 cw(c2344.96,1058.42) 2382.6,1058.42 ; C310.2@2371.57,1085.04 cw(c2344.96,1058.42) 2382.6,1058.42 ; 2382.6,962.6 cw(c2357.08,962.6) 2373.82,943.34 ccw(c2357.08,962.6) 2382.6,962.6 ; 2382.6,962.6 ccw(c2392.87,952.33) 2381.92,942.78 cw(c2392.87,952.33) 2382.6,962.6 ; 2382.6,1058.42 cw(c2420.24,1058.42) C310.2@2393.62,1085.04 ; 2382.6,1058.42 cw(c2420.24,1058.42) C310.2@2393.62,1085.04 ; 2382.6,1058.42 cw(c2420.24,1058.42) C310.2@2393.62,1085.04 ; C320.2@4051.57,1085.04 cw(c4024.96,1058.42) 4062.6,1058.42 ; C320.2@4051.57,1085.04 cw(c4024.96,1058.42) 4062.6,1058.42 ; C320.2@4051.57,1085.04 cw(c4024.96,1058.42) 4062.6,1058.42 ; 4062.6,962.6 cw(c4037.08,962.6) 4053.82,943.34 ccw(c4037.08,962.6) 4062.6,962.6 ; 4062.6,962.6 ccw(c4072.87,952.33) 4061.92,942.78 cw(c4072.87,952.33) 4062.6,962.6 ; 4062.6,1058.42 cw(c4100.24,1058.42) C320.2@4073.62,1085.04 ; 4062.6,1058.42 cw(c4100.24,1058.42) C320.2@4073.62,1085.04 ; 4062.6,1058.42 cw(c4100.24,1058.42) C320.2@4073.62,1085.04 ; C301.2@533.53,943.06 ccw(c511.62,964.97) 542.6,964.97 cw(c511.62,964.97) C301.2@533.53,943.06 ; C301.2@535.62,944.06 ccw(c518.78,960.91) 542.6,960.91 cw(c518.78,960.91) C301.2@535.62,944.06 ; C312.2@2373.53,943.06 ccw(c2351.62,964.97) 2382.6,964.97 cw(c2351.62,964.97) C312.2@2373.53,943.06 ; C312.2@2375.62,944.06 ccw(c2358.78,960.91) 2382.6,960.91 cw(c2358.78,960.91) C312.2@2375.62,944.06 ; C321.2@4053.53,943.06 ccw(c4031.62,964.97) 4062.6,964.97 cw(c4031.62,964.97) C321.2@4053.53,943.06 ; C321.2@4055.62,944.06 ccw(c4038.78,960.91) 4062.6,960.91 cw(c4038.78,960.91) C321.2@4055.62,944.06
  other v1: 1310,3095
AMP_IN1: P10.2 R202.1 | length 762.8
  Top Layer w15: R202.1@2275,2525 2295,2545 P10.2@2400,2545 ; R202.1@2277.19,2526.75 cw(c2321.24,2482.7) 2321.24,2545 ; R202.1@2277.19,2526.75 cw(c2321.24,2482.7) 2321.24,2545 ; R202.1@2277.19,2526.75 cw(c2321.24,2482.7) 2321.24,2545 ; R202.1@2287.79,2516.15 cw(c2357.45,2446.48) 2357.45,2545 ; R202.1@2287.79,2516.15 cw(c2357.45,2446.48) 2357.45,2545 ; R202.1@2287.79,2516.15 cw(c2357.45,2446.48) 2357.45,2545 ; 2346.82,2545 ccw(c2346.82,2598.18) P10.2@2384.42,2560.58 ; 2346.82,2545 cw(c2346.82,2491.82) P10.2@2384.42,2529.42 ; 2346.82,2545 ccw(c2346.82,2598.18) P10.2@2384.42,2560.58 ; 2346.82,2545 cw(c2346.82,2491.82) P10.2@2384.42,2529.42 ; 2346.82,2545 ccw(c2346.82,2598.18) P10.2@2384.42,2560.58 ; 2346.82,2545 cw(c2346.82,2491.82) P10.2@2384.42,2529.42
AMP_IN2: P11.2 R212.1 | length 762.8
  Top Layer w15: R212.1@2678,2532 2698,2552 P11.2@2803,2552 ; R212.1@2680.19,2533.75 cw(c2724.24,2489.7) 2724.24,2552 ; R212.1@2680.19,2533.75 cw(c2724.24,2489.7) 2724.24,2552 ; R212.1@2680.19,2533.75 cw(c2724.24,2489.7) 2724.24,2552 ; R212.1@2690.79,2523.15 cw(c2760.45,2453.48) 2760.45,2552 ; R212.1@2690.79,2523.15 cw(c2760.45,2453.48) 2760.45,2552 ; R212.1@2690.79,2523.15 cw(c2760.45,2453.48) 2760.45,2552 ; 2749.82,2552 ccw(c2749.82,2605.18) P11.2@2787.42,2567.58 ; 2749.82,2552 cw(c2749.82,2498.82) P11.2@2787.42,2536.42 ; 2749.82,2552 ccw(c2749.82,2605.18) P11.2@2787.42,2567.58 ; 2749.82,2552 cw(c2749.82,2498.82) P11.2@2787.42,2536.42 ; 2749.82,2552 ccw(c2749.82,2605.18) P11.2@2787.42,2567.58 ; 2749.82,2552 cw(c2749.82,2498.82) P11.2@2787.42,2536.42
AMP_IN3: P12.2 R222.1 | length 662.8
  Top Layer w15: R222.1@3076,2538 3090,2552 P12.2@3200,2552 ; R222.1@3078.19,2539.75 cw(c3107.76,2510.18) 3107.76,2552 ; R222.1@3078.19,2539.75 cw(c3107.76,2510.18) 3107.76,2552 ; R222.1@3078.19,2539.75 cw(c3107.76,2510.18) 3107.76,2552 ; R222.1@3088.79,2529.15 cw(c3143.97,2473.97) 3143.97,2552 ; R222.1@3088.79,2529.15 cw(c3143.97,2473.97) 3143.97,2552 ; R222.1@3088.79,2529.15 cw(c3143.97,2473.97) 3143.97,2552 ; 3146.82,2552 ccw(c3146.82,2605.18) P12.2@3184.42,2567.58 ; 3146.82,2552 cw(c3146.82,2498.82) P12.2@3184.42,2536.42 ; 3146.82,2552 ccw(c3146.82,2605.18) P12.2@3184.42,2567.58 ; 3146.82,2552 cw(c3146.82,2498.82) P12.2@3184.42,2536.42 ; 3146.82,2552 ccw(c3146.82,2605.18) P12.2@3184.42,2567.58 ; 3146.82,2552 cw(c3146.82,2498.82) P12.2@3184.42,2536.42
AMP_OUT1: C21.1 P20.1 R203.2 | length 1790.4
  Top Layer w10: C21.1@1493.4,1820 1548.4,1875 1611.8,1875 R203.2@1681.8,1805 1955,1805 P20.1@1960,1800 ; C21.1@1493.4,1834.53 ccw(c1493.4,1869.6) C21.1@1518.2,1844.8 ; C21.1@1493.4,1834.53 ccw(c1493.4,1869.6) C21.1@1518.2,1844.8 ; C21.1@1493.4,1834.53 ccw(c1493.4,1869.6) C21.1@1518.2,1844.8 ; C21.1@1493.4,1844.53 ccw(c1493.4,1903.74) 1535.27,1861.87 ; C21.1@1493.4,1844.53 ccw(c1493.4,1903.74) 1535.27,1861.87 ; C21.1@1493.4,1844.53 ccw(c1493.4,1903.74) 1535.27,1861.87 ; C21.1@1513.99,1823.94 cw(c1554.2,1823.94) 1525.77,1852.37 ; C21.1@1513.99,1823.94 cw(c1554.2,1823.94) 1525.77,1852.37 ; C21.1@1513.99,1823.94 cw(c1554.2,1823.94) 1525.77,1852.37 ; 1639.93,1846.87 ccw(c1681.8,1888.74) R203.2@1681.8,1829.53 ; 1639.93,1846.87 ccw(c1681.8,1888.74) R203.2@1681.8,1829.53 ; 1639.93,1846.87 ccw(c1681.8,1888.74) R203.2@1681.8,1829.53 ; 1649.44,1837.37 cw(c1621.01,1808.94) R203.2@1661.21,1808.94 ; 1649.44,1837.37 cw(c1621.01,1808.94) R203.2@1661.21,1808.94 ; 1649.44,1837.37 cw(c1621.01,1808.94) R203.2@1661.21,1808.94 ; R203.2@1657,1829.8 ccw(c1681.8,1854.6) R203.2@1681.8,1819.53 ; R203.2@1657,1829.8 ccw(c1681.8,1854.6) R203.2@1681.8,1819.53 ; R203.2@1657,1829.8 ccw(c1681.8,1854.6) R203.2@1681.8,1819.53 ; R203.2@1696.36,1790.44 cw(c1731.51,1755.29) 1731.51,1805 ; R203.2@1696.36,1790.44 cw(c1731.51,1755.29) 1731.51,1805 ; R203.2@1696.36,1790.44 cw(c1731.51,1755.29) 1731.51,1805 ; R203.2@1696.36,1819.56 ccw(c1731.51,1854.71) 1731.51,1805 ; R203.2@1696.36,1819.56 ccw(c1731.51,1854.71) 1731.51,1805 ; R203.2@1696.36,1819.56 ccw(c1731.51,1854.71) 1731.51,1805 ; 1888.71,1805 cw(c1888.71,1728.71) P20.1@1942.66,1782.66 ; 1888.71,1805 cw(c1888.71,1728.71) P20.1@1942.66,1782.66 ; 1888.71,1805 cw(c1888.71,1728.71) P20.1@1942.66,1782.66 ; 1912.86,1805 ccw(c1912.86,1847.14) P20.1@1942.66,1817.34 ; 1912.86,1805 cw(c1912.86,1752.86) P20.1@1949.73,1789.73 ; 1912.86,1805 ccw(c1912.86,1847.14) P20.1@1942.66,1817.34 ; 1912.86,1805 cw(c1912.86,1752.86) P20.1@1949.73,1789.73 ; 1912.86,1805 ccw(c1912.86,1847.14) P20.1@1942.66,1817.34 ; 1912.86,1805 cw(c1912.86,1752.86) P20.1@1949.73,1789.73
AMP_OUT2: C23.1 P21.1 R213.2 | length 1976.9
  Top Layer w10: C23.1@2686.4,1820 2783.2,1820 R213.2@2798.2,1805 2868.2,1875 3069,1875 P21.1@3151,1793 ; C23.1@2700.96,1805.44 cw(c2736.11,1770.29) 2736.11,1820 ; C23.1@2700.96,1805.44 cw(c2736.11,1770.29) 2736.11,1820 ; C23.1@2700.96,1805.44 cw(c2736.11,1770.29) 2736.11,1820 ; C23.1@2700.96,1834.56 ccw(c2736.11,1869.71) 2736.11,1820 ; C23.1@2700.96,1834.56 ccw(c2736.11,1869.71) 2736.11,1820 ; C23.1@2700.96,1834.56 ccw(c2736.11,1869.71) 2736.11,1820 ; 2721.78,1820 cw(c2721.78,1732.52) R213.2@2783.64,1794.38 ; 2721.78,1820 cw(c2721.78,1732.52) R213.2@2783.64,1794.38 ; 2721.78,1820 cw(c2721.78,1732.52) R213.2@2783.64,1794.38 ; 2745.92,1820 cw(c2745.92,1756.66) R213.2@2790.71,1801.45 ; 2745.92,1820 cw(c2745.92,1756.66) R213.2@2790.71,1801.45 ; 2745.92,1820 cw(c2745.92,1756.66) R213.2@2790.71,1801.45 ; 2770.06,1820 cw(c2770.06,1780.8) R213.2@2797.78,1808.52 ; 2770.06,1820 cw(c2770.06,1780.8) R213.2@2797.78,1808.52 ; 2770.06,1820 cw(c2770.06,1780.8) R213.2@2797.78,1808.52 ; R213.2@2798.2,1819.53 ccw(c2798.2,1854.6) R213.2@2823,1829.8 ; R213.2@2798.2,1819.53 ccw(c2798.2,1854.6) R213.2@2823,1829.8 ; R213.2@2798.2,1819.53 ccw(c2798.2,1854.6) R213.2@2823,1829.8 ; R213.2@2798.2,1829.53 ccw(c2798.2,1888.74) 2840.07,1846.87 ; R213.2@2798.2,1829.53 ccw(c2798.2,1888.74) 2840.07,1846.87 ; R213.2@2798.2,1829.53 ccw(c2798.2,1888.74) 2840.07,1846.87 ; R213.2@2818.79,1808.94 cw(c2858.99,1808.94) 2830.56,1837.37 ; R213.2@2818.79,1808.94 cw(c2858.99,1808.94) 2830.56,1837.37 ; R213.2@2818.79,1808.94 cw(c2858.99,1808.94) 2830.56,1837.37 ; 3109.13,1834.87 ccw(c3151,1876.74) P21.1@3151,1817.53 ; 3109.13,1834.87 cw(c3067.26,1793) P21.1@3126.47,1793 ; 3109.13,1834.87 ccw(c3151,1876.74) P21.1@3151,1817.53 ; 3109.13,1834.87 cw(c3067.26,1793) P21.1@3126.47,1793 ; 3109.13,1834.87 ccw(c3151,1876.74) P21.1@3151,1817.53 ; 3109.13,1834.87 cw(c3067.26,1793) P21.1@3126.47,1793 ; P21.1@3126.2,1817.8 ccw(c3151,1842.6) P21.1@3151,1807.53 ; P21.1@3126.2,1817.8 cw(c3101.4,1793) P21.1@3136.47,1793 ; P21.1@3126.2,1817.8 ccw(c3151,1842.6) P21.1@3151,1807.53 ; P21.1@3126.2,1817.8 cw(c3101.4,1793) P21.1@3136.47,1793 ; P21.1@3126.2,1817.8 ccw(c3151,1842.6) P21.1@3151,1807.53 ; P21.1@3126.2,1817.8 cw(c3101.4,1793) P21.1@3136.47,1793
AMP_OUT3: C25.1 P23.1 R223.2 | length 1495.7
  Top Layer w15: C25.1@3874.4,1820 3969.2,1820 R223.2@3984.2,1805 3984.2,1809.2 4040,1865 4284,1865 P23.1@4349,1800 ; C25.1@3887.19,1807.21 cw(c3918.08,1776.33) 3918.08,1820 ; C25.1@3887.19,1807.21 cw(c3918.08,1776.33) 3918.08,1820 ; C25.1@3887.19,1807.21 cw(c3918.08,1776.33) 3918.08,1820 ; C25.1@3887.19,1832.79 ccw(c3918.08,1863.67) 3918.08,1820 ; C25.1@3887.19,1832.79 ccw(c3918.08,1863.67) 3918.08,1820 ; C25.1@3887.19,1832.79 ccw(c3918.08,1863.67) 3918.08,1820 ; 3913.81,1820 cw(c3913.81,1738.55) R223.2@3971.4,1796.15 ; 3913.81,1820 cw(c3913.81,1738.55) R223.2@3971.4,1796.15 ; 3913.81,1820 cw(c3913.81,1738.55) R223.2@3971.4,1796.15 ; 3950.03,1820 cw(c3950.03,1774.77) R223.2@3982.01,1806.75 ; 3950.03,1820 cw(c3950.03,1774.77) R223.2@3982.01,1806.75 ; 3950.03,1820 cw(c3950.03,1774.77) R223.2@3982.01,1806.75 ; R223.2@3984.2,1827.03 ccw(c3984.2,1870.08) 4014.64,1839.64 ; R223.2@3984.2,1827.03 ccw(c3984.2,1870.08) 4014.64,1839.64 ; R223.2@3984.2,1827.03 ccw(c3984.2,1870.08) 4014.64,1839.64 ; R223.2@4002.29,1808.94 cw(c4046.59,1808.94) 4015.26,1840.26 ; R223.2@4002.29,1808.94 cw(c4046.59,1808.94) 4015.26,1840.26 ; R223.2@4002.29,1808.94 cw(c4046.59,1808.94) 4015.26,1840.26 ; 4311.4,1837.6 ccw(c4349,1875.21) P23.1@4349,1822.03 ; 4311.4,1837.6 cw(c4273.79,1800) P23.1@4326.97,1800 ; 4311.4,1837.6 ccw(c4349,1875.21) P23.1@4349,1822.03 ; 4311.4,1837.6 cw(c4273.79,1800) P23.1@4326.97,1800 ; 4311.4,1837.6 ccw(c4349,1875.21) P23.1@4349,1822.03 ; 4311.4,1837.6 cw(c4273.79,1800) P23.1@4326.97,1800
AV+12: C2-0.1 C2-4.1 C07.1 C08.1 C303.2 C313.2 C322.2 POWER-IN.2 POWER-OUT.1 U5.7 U6.7 U7.7 U8.7 U9.7 U10.7 ±12V.1 | length 15304.2
  Top Layer w15: U8.7@1660,1570 v1(1805,1570) 1830,1570 1870.72,1610.72 C303.2@1952.6,1610.72 ; U5.7@1660,2150 v1(1805,2150) C2-0.1@1805,2213.6 ; U9.7@2840,1570 v1(2980,1570) 3015,1570 3055.72,1610.72 C313.2@3157.6,1610.72 ; U6.7@2840,2150 v1(2980,2150) ; U10.7@4020,1570 v1(4165,1570) 4205,1570 4245.72,1610.72 C322.2@4351.6,1610.72 ; U7.7@4020,2150 v1@4165,2150 ; C2-4.1@4168.6,2220 4165,2216.4 v1@4165,2150 ; C2-0.1@1772.08,2217.11 cw(c1714.36,2147.23) v1@1805,2147.23 ; C2-0.1@1772.08,2217.11 cw(c1714.36,2147.23) v1@1805,2147.23 ; C2-0.1@1772.08,2217.11 cw(c1714.36,2147.23) v1@1805,2147.23 ; C2-0.1@1781.63,2228.68 cw(c1740.66,2179.07) 1805,2179.07 ; C2-0.1@1781.63,2228.68 cw(c1740.66,2179.07) 1805,2179.07 ; C2-0.1@1781.63,2228.68 cw(c1740.66,2179.07) 1805,2179.07 ; C2-0.1@1791.18,2240.25 cw(c1766.96,2210.91) C2-0.1@1805,2210.91 ; C2-0.1@1791.18,2240.25 cw(c1766.96,2210.91) C2-0.1@1805,2210.91 ; C2-0.1@1791.18,2240.25 cw(c1766.96,2210.91) C2-0.1@1805,2210.91 ; 1908.92,1610.72 ccw(c1908.92,1654.39) C303.2@1939.81,1623.51 ; 1908.92,1610.72 cw(c1908.92,1567.05) C303.2@1939.81,1597.93 ; 1908.92,1610.72 ccw(c1908.92,1654.39) C303.2@1939.81,1623.51 ; 1908.92,1610.72 cw(c1908.92,1567.05) C303.2@1939.81,1597.93 ; 1908.92,1610.72 ccw(c1908.92,1654.39) C303.2@1939.81,1623.51 ; 1908.92,1610.72 cw(c1908.92,1567.05) C303.2@1939.81,1597.93 ; 3113.92,1610.72 ccw(c3113.92,1654.39) C313.2@3144.81,1623.51 ; 3113.92,1610.72 cw(c3113.92,1567.05) C313.2@3144.81,1597.93 ; 3113.92,1610.72 ccw(c3113.92,1654.39) C313.2@3144.81,1623.51 ; 3113.92,1610.72 cw(c3113.92,1567.05) C313.2@3144.81,1597.93 ; 3113.92,1610.72 ccw(c3113.92,1654.39) C313.2@3144.81,1623.51 ; 3113.92,1610.72 cw(c3113.92,1567.05) C313.2@3144.81,1597.93 ; 4152.93,2150 cw(c4152.93,2132.93) v1(4165,2145) ; 4152.93,2150 cw(c4152.93,2132.93) v1(4165,2145) ; 4152.93,2150 cw(c4152.93,2132.93) v1(4165,2145) ; C2-4.1@4155.81,2203.27 cw(c4133.61,2181.07) 4165,2181.07 ; C2-4.1@4155.81,2203.27 cw(c4133.61,2181.07) 4165,2181.07 ; C2-4.1@4155.81,2203.27 cw(c4133.61,2181.07) 4165,2181.07 ; v1(4165,2145) v1@4165,2150 ; 4165,2163.7 cw(c4220.96,2163.7) C2-4.1@4181.39,2203.27 ; 4165,2163.7 cw(c4220.96,2163.7) C2-4.1@4181.39,2203.27 ; 4165,2163.7 cw(c4220.96,2163.7) C2-4.1@4181.39,2203.27 ; 4307.92,1610.72 ccw(c4307.92,1654.39) C322.2@4338.81,1623.51 ; 4307.92,1610.72 cw(c4307.92,1567.05) C322.2@4338.81,1597.93 ; 4307.92,1610.72 ccw(c4307.92,1654.39) C322.2@4338.81,1623.51 ; 4307.92,1610.72 cw(c4307.92,1567.05) C322.2@4338.81,1597.93 ; 4307.92,1610.72 ccw(c4307.92,1654.39) C322.2@4338.81,1623.51 ; 4307.92,1610.72 cw(c4307.92,1567.05) C322.2@4338.81,1597.93
  Top Layer w30: POWER-IN.2@2520,3260 2525,3255 2525,3080 2545.6,3059.4 ; C08.1@2525.11,3059.58 cw(c2530.33,3024.45) 2545.7,3056.46 ; C07.1@2660,3059.4 2545.6,3059.4 ; POWER-IN.2@2495.81,3235.81 cw(c2425.33,3165.33) 2525,3165.33 ; POWER-IN.2@2495.81,3235.81 cw(c2425.33,3165.33) 2525,3165.33 ; POWER-IN.2@2495.81,3235.81 cw(c2425.33,3165.33) 2525,3165.33 ; 2525,3189.47 cw(c2590.53,3189.47) POWER-IN.2@2544.19,3235.81 ; 2525,3189.47 cw(c2590.53,3189.47) POWER-IN.2@2544.19,3235.81 ; 2525,3189.47 cw(c2590.53,3189.47) POWER-IN.2@2544.19,3235.81 ; 2545.6,3059.4 cw(c2545.6,3083.75) 2525.61,3069.84 ccw(c2545.6,3083.75) 2545.6,3059.4 ; C08.1@2525,3068.66 cw(c2525,3041.29) 2544.36,3060.64 ccw(c2525,3041.29) C08.1@2525,3068.66 ; C08.1@2525.53,3069.94 ccw(c2550.97,3095.38) 2550.97,3059.4 cw(c2550.97,3095.38) C08.1@2525.53,3069.94
  Top Layer w39.37: v1@1805,1340 4995,1340 5460,1805 5460,3270 5286,3444 ±12V.1@5003,3444
  Top Layer w60: POWER-IN.2@2520,3260 2520,3510 2705,3695 v6(4515,3695) 4900,3695 5003,3592 ±12V.1@5003,3444 ±12V.1@5015,3444
  Bottom Layer w15: v1(1805,1345) v1(1805,1570) v1(1805,2150) ; v1(2980,1345) v1(2980,1570) v1(2980,2150) ; v1(4165,1340) v1(4165,1570) v1(4165,2145)
  Bottom Layer w60: v6(4515,3695) 4520,3690 POWER-OUT.1@4520,3480
AV-12: C2-1.1 C2-5.1 C09.1 C010.2 C305.2 C315.2 C324.2 POWER-IN.3 POWER-OUT.2 U5.4 U6.4 U7.4 U8.4 U9.4 U10.4 ±12V.2 | length 14622
  Top Layer w15: C305.2@1012.4,1610.72 1269.28,1610.72 v1(1270,1610) ; C2-1.1@1018.4,2204 1269,2204 v1(1270,2205) ; v1(1270,1470) U8.4@1440,1470 ; v1(1270,2050) U5.4@1440,2050 ; C315.2@2278.79,1609 2474,1609 v1(2475,1610) ; v1(2475,1470) U9.4@2620,1470 ; v1(2475,2050) U6.4@2620,2050 ; 3455,2340 3455.4,2339.6 ; C2-5.1@3455.4,2203 v1(3648,2203) ; C324.2@3465.4,1609 3649,1609 v1(3650,1610) ; v1(3650,1470) U10.4@3800,1470 ; v1(3650,2050) U7.4@3800,2050 ; C305.2@1025.19,1597.93 cw(c1056.08,1567.05) 1056.08,1610.72 ; C305.2@1025.19,1597.93 cw(c1056.08,1567.05) 1056.08,1610.72 ; C305.2@1025.19,1597.93 cw(c1056.08,1567.05) 1056.08,1610.72 ; C305.2@1025.19,1623.51 ccw(c1056.08,1654.39) 1056.08,1610.72 ; C305.2@1025.19,1623.51 ccw(c1056.08,1654.39) 1056.08,1610.72 ; C305.2@1025.19,1623.51 ccw(c1056.08,1654.39) 1056.08,1610.72 ; C2-1.1@1031.19,2191.21 cw(c1062.08,2160.33) 1062.08,2204 ; C2-1.1@1031.19,2191.21 cw(c1062.08,2160.33) 1062.08,2204 ; C2-1.1@1031.19,2191.21 cw(c1062.08,2160.33) 1062.08,2204 ; C2-1.1@1031.19,2216.79 ccw(c1062.08,2247.67) 1062.08,2204 ; C2-1.1@1031.19,2216.79 ccw(c1062.08,2247.67) 1062.08,2204 ; C2-1.1@1031.19,2216.79 ccw(c1062.08,2247.67) 1062.08,2204 ; C315.2@2291.58,1596.21 cw(c2322.46,1565.33) 2322.46,1609 ; C315.2@2291.58,1596.21 cw(c2322.46,1565.33) 2322.46,1609 ; C315.2@2291.58,1596.21 cw(c2322.46,1565.33) 2322.46,1609 ; C315.2@2291.58,1621.79 ccw(c2322.46,1652.67) 2322.46,1609 ; C315.2@2291.58,1621.79 ccw(c2322.46,1652.67) 2322.46,1609 ; C315.2@2291.58,1621.79 ccw(c2322.46,1652.67) 2322.46,1609 ; C2-5.1@3468.19,2190.21 cw(c3499.08,2159.33) 3499.08,2203 ; C2-5.1@3468.19,2190.21 cw(c3499.08,2159.33) 3499.08,2203 ; C2-5.1@3468.19,2190.21 cw(c3499.08,2159.33) 3499.08,2203 ; C2-5.1@3468.19,2215.79 ccw(c3499.08,2246.67) 3499.08,2203 ; C2-5.1@3468.19,2215.79 ccw(c3499.08,2246.67) 3499.08,2203 ; C2-5.1@3468.19,2215.79 ccw(c3499.08,2246.67) 3499.08,2203 ; C324.2@3478.19,1596.21 cw(c3509.08,1565.33) 3509.08,1609 ; C324.2@3478.19,1596.21 cw(c3509.08,1565.33) 3509.08,1609 ; C324.2@3478.19,1596.21 cw(c3509.08,1565.33) 3509.08,1609 ; C324.2@3478.19,1621.79 ccw(c3509.08,1652.67) 3509.08,1609 ; C324.2@3478.19,1621.79 ccw(c3509.08,1652.67) 3509.08,1609 ; C324.2@3478.19,1621.79 ccw(c3509.08,1652.67) 3509.08,1609
  Top Layer w30: POWER-IN.3@2720,3260 2820,3160 2820,3084 2840.18,3063.82 C010.2@2820.01,3063.57 ; 2844.6,3059.4 C09.1@2960,3059.4 ; 2778.4,3201.6 ccw(c2720,3143.19) 2720,3225.79 cw(c2720,3143.19) 2778.4,3201.6 ; 2778.4,3201.6 cw(c2836.81,3260) 2754.21,3260 ccw(c2836.81,3260) 2778.4,3201.6 ; C010.2@2821.53,3066.94 ccw(c2839.72,3085.13) 2839.72,3059.4 ; C010.2@2821.53,3066.94 ccw(c2839.72,3085.13) 2839.72,3059.4 ; C010.2@2821.53,3066.94 ccw(c2839.72,3085.13) 2839.72,3059.4 ; C010.2@2821.53,3066.94 ccw(c2839.72,3085.13) 2839.72,3059.4 ; C010.2@2821.06,3065.66 cw(c2823.75,3030.81) 2848.47,3055.53 ccw(c2823.75,3030.81) C010.2@2821.06,3065.66
  Top Layer w39.37: v1(1270,2340) 3455,2340 v1(3650,2340) 5245,2340 5350,2445 5350,3230 5265,3315 4955,3315 4903,3367 ±12V.2@4903,3444
  Top Layer w60: POWER-IN.3@2720,3260 2720,3465 2870,3615 v6(4360,3615) 4800,3615 4903,3512 ±12V.2@4903,3444 ±12V.2@4903,3450
  Bottom Layer w15: v1(1270,1470) v1(1270,1610) v1(1270,2050) v1(1270,2340) ; v1(2475,1470) v1(2475,2050) v1(2475,2335) ; v1(3650,1470) v1(3650,1610) v1(3650,2050) v1(3650,2340)
  Bottom Layer w60: POWER-OUT.2@4360,3480 v6(4360,3615)